# Altium PCB TourniquetPCBV1.PcbDoc (part 2 of 2)
Units mil, origin at the board's own origin, x right, y up, seen from the top; angles counter-clockwise.
Board outline 6000 x 4000 mil, 2 copper layers (Top Layer, Bottom Layer); 66 components, 50 nets, 230 pads, 0 vias.
Unrouted connection lines stored in the file: 158.
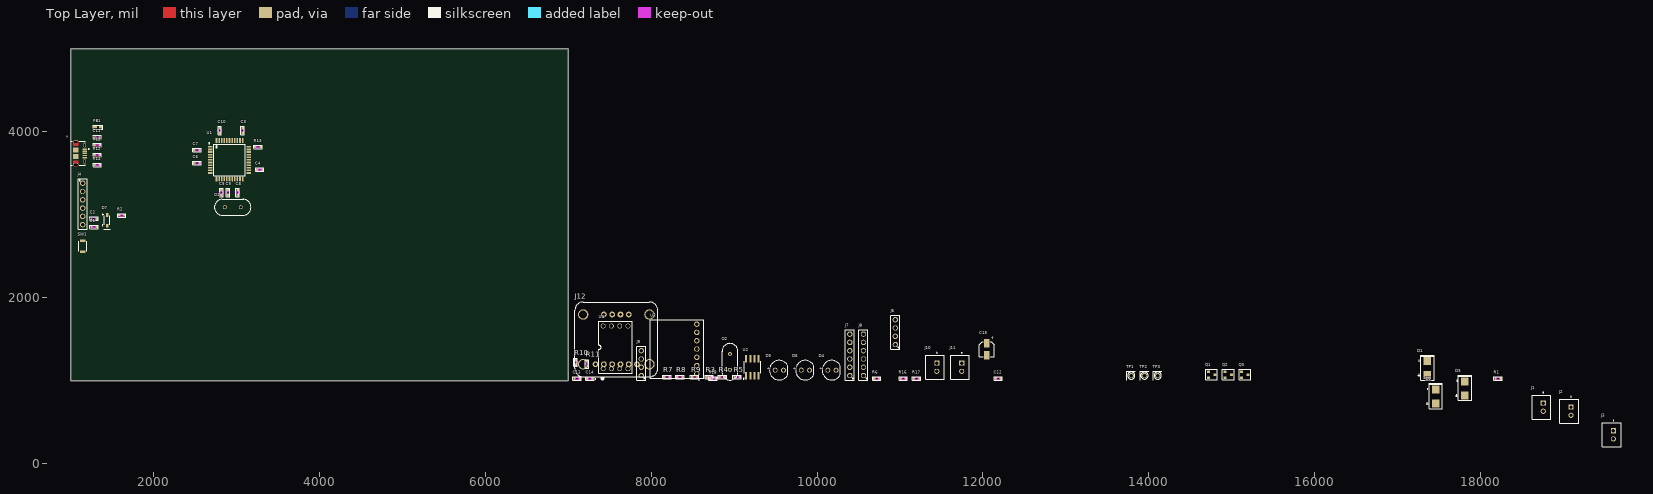
[diagram p0: Top Layer view]

## Part data (continued)
O2: "32.768 kHz ±20ppm Crystal 6pF 35 kOhms Cylindrical Can, Radial", Case/Package=SMD/SMT, ESR (Equivalent Series Resistance)=60Ω, Frequency=16MHz, Frequency Stability=18ppm, Frequency Tolerance=0.001%, Load Capacitance=9pF, Manufacturer=Epson, Manufacturer Part Number="TSX-3225 16.0000MF18X-AC0", Max Operating Temperature=85°C, Min Operating Temperature=-40°C, Supplier Part Number=SER4070CT-ND, Category=Crystals, China RoHS=Compliant, ComponentLink1Description=https://datasheet.octopart.com:443/TSX-3225-16.0000MF18X-AC0-Epson-datasheet-61114919.pdf?src-supplier=Electro+Sonic, ComponentLink1URL=https://datasheet.octopart.com:443/TSX-3225-16.0000MF18X-AC0-Epson-datasheet-61114919.pdf?src-supplier=Electro+Sonic, ComponentLink2Description=https://datasheet.octopart.com:443/TSX-322516.0000MF18X-AC0-Epson-datasheet-189100294.pdf?src-supplier=Electro+Sonic, ComponentLink2URL=https://datasheet.octopart.com:443/TSX-322516.0000MF18X-AC0-Epson-datasheet-189100294.pdf?src-supplier=Electro+Sonic, ComponentLink3Description=https://datasheet.octopart.com:443/TSX-322516.0000MF18X-AC0-Epson-datasheet-180663999.pdf?src-supplier=IHS, ComponentLink3URL=https://datasheet.octopart.com:443/TSX-322516.0000MF18X-AC0-Epson-datasheet-180663999.pdf?src-supplier=IHS, ComponentLink4Description=https://datasheet.octopart.com:443/TSX-3225-16.0000MF18X-AC0-Epson-datasheet-140567378.pdf?src-supplier=Arrow.cn, ComponentLink4URL=https://datasheet.octopart.com:443/TSX-3225-16.0000MF18X-AC0-Epson-datasheet-140567378.pdf?src-supplier=Arrow.cn, ComponentLink5Description=http://sigma.octopart.com:80/149135495/reach_statement/Epson-TSX-3225-16.0000MF18X-AC0.pdf?src-supplier=Compliance+Statements, ComponentLink5URL=http://sigma.octopart.com:80/149135495/reach_statement/Epson-TSX-3225-16.0000MF18X-AC0.pdf?src-supplier=Compliance+Statements, ComponentLink6Description=http://sigma.octopart.com:80/149135496/rohs_statement/Epson-TSX-3225-16.0000MF18X-AC0.pdf?src-supplier=Compliance+Statements, ComponentLink6URL=http://sigma.octopart.com:80/149135496/rohs_statement/Epson-TSX-3225-16.0000MF18X-AC0.pdf?src-supplier=Compliance+Statements, ESR=60Ω, Height=600µm, Length=3.2004mm, Lifecycle Status=Production, Mounting Technology="Surface Mount", Pricing="1=0.37, 10=0.324, 25=0.3068, 50=0.294, 100=0.2819, 250=0.26656, 500=0.25552 (USD)", REACH SVHC=Yes, RoHS=Compliant, Schedule B=8541600080, Stock=610, Supplier=DigiKey, Tolerance=0.001%, Width=2.4892mm
Q1 Q2 Q3: Current Rating=2A, Manufacturer="MCC (Micro Commercial Components)", Max Operating Temperature=105°C, Min Operating Temperature=-55°C, Supplier Part Number 1=WM3590-ND, Voltage Rating=125V, ComponentLink1Description=Datasheet, ComponentLink1URL=https://tools.molex.com/pdm_docs/ps/PS-87831-027.pdf, Fastening Type="Latch Holder", Gender=Male, Manufacturer Part Number=SI2300-TP, Number of Positions=6, Number of Rows=2, Orientation=Vertical, Part Number=SI2300-TP, Reviewed=No, Series=-, Supplier 1=Digi-Key
R1 R2 R3 R4 R5 R6 R7 R8 R9 R10 R11 R12 R13 R14 R15 R16 R17 R18: library part RESISTOR, Case Code (Imperial)=0603, Case Code (Metric)=1608, Max Operating Temperature=155°C, Max Power Dissipation=100mW, Min Operating Temperature=-55°C, Resistance=10kR, Resistance Tolerance=1%, Resistor Type="Thick Film", Temperature Coefficient=100ppm/°C, Voltage Rating=75V, Voltage Rating (DC)=50V, Case/Package=0603, Construction=Rectangular, Depth=0.8mm, Features="Moisture Resistant", Height=0.45mm, Lead Free="Lead Free", Lead Pitch=0.3mm, Length=1.6mm, Military Standard=Not, Number of Pins=2, Number of Terminations=2, Packaging="Tape and Reel", Power Rating=100mW, RoHS Compliant=Yes, Series=RC, Size Code=0603, Termination=SMD/SMT, Tolerance=1%, Weight=7.1E-05oz, Width=0.8mm
SW1: "Switch Tactile N.O. SPST Round Button Gull Wing 0.05A 12VDC 1.5N SMD Embossed T/R", Ambient Temperature Range High=70°C, Case/Package=SMD/SMT, Color=Black, Contact Current Rating=50mA, Contact Resistance=100mΩ, Insulation Resistance=100MΩ, Manufacturer=Omron, Manufacturer Part Number=B3U-1100PM, Max Voltage Rating (DC)=12V, Min Operating Temperature=-25°C, Operating Force=1.5N, Ratings="Dust Proof", Supplier Part Number=SW1451CT-ND, Actuator Length=400µm, Category="Tactile Switches", ComponentLink1Description=https://datasheet.octopart.com:443/B3U-1100PM-Omron-datasheet-62106914.pdf?src-supplier=IHS, ComponentLink1URL=https://datasheet.octopart.com:443/B3U-1100PM-Omron-datasheet-62106914.pdf?src-supplier=IHS, ComponentLink2Description=https://datasheet.octopart.com:443/B3U-1100PM-Omron-datasheet-10910421.pdf?src-supplier=Omron, ComponentLink2URL=https://datasheet.octopart.com:443/B3U-1100PM-Omron-datasheet-10910421.pdf?src-supplier=Omron, ComponentLink3Description=https://datasheet.octopart.com:443/B3U-1100PM-Omron-datasheet-17589256.pdf?src-supplier=Farnell, ComponentLink3URL=https://datasheet.octopart.com:443/B3U-1100PM-Omron-datasheet-17589256.pdf?src-supplier=Farnell, ComponentLink4Description=https://datasheet.octopart.com:443/B3U-1100PM-Omron-datasheet-5458533.pdf?src-supplier=Sager+Electronics, ComponentLink4URL=https://datasheet.octopart.com:443/B3U-1100PM-Omron-datasheet-5458533.pdf?src-supplier=Sager+Electronics, ComponentLink5Description=https://datasheet.octopart.com:443/B3U-1100PM-Omron-datasheet-110759174.pdf?src-supplier=Newark, ComponentLink5URL=https://datasheet.octopart.com:443/B3U-1100PM-Omron-datasheet-110759174.pdf?src-supplier=Newark, ComponentLink6Description=https://datasheet.octopart.com:443/B3U-1100PM-Omron-datasheet-156114341.pdf?src-supplier=TME, ComponentLink6URL=https://datasheet.octopart.com:443/B3U-1100PM-Omron-datasheet-156114341.pdf?src-supplier=TME, Connector Type=SMD/SMT, Contact Plating=Silver, Current Rating=50mA, Electrical Life=200kcycles, Height=1.2mm, Illumination Type="Illuminated, Non-Illuminated", Length=3mm, Life (Cycles)=200kcycles, Lifecycle Status=Production, Max Operating Temperature=70°C, Mechanical Life=200kcycles, Mounting Technology="Surface Mount", Number of Positions=1, Orientation=Straight, Packaging=Digi-Reel®, Pricing="1=0.77, 10=0.77 (USD)", REACH SVHC=No, RoHS=Compliant, Sealable=IP40, Stock=1875, Supplier=DigiKey, Switch Function=Off-Mom, Switch Travel=150µm, Termination=SMD/SMT, Throw Configuration=SPST, Voltage Rating (DC)=12V, Weight=22mg
TP1 TP2 TP3: "Test Point Hole", Current Rating=2A, Manufacturer=Molex, Manufacturer Part Number=0878310641, Max Operating Temperature=105°C, Min Operating Temperature=-55°C, Supplier Part Number 1=WM3590-ND, Voltage Rating=125V, ComponentLink1Description=Datasheet, ComponentLink1URL=https://tools.molex.com/pdm_docs/ps/PS-87831-027.pdf, Fastening Type="Latch Holder", Gender=Male, Mount="Through Hole", Number of Positions=6, Number of Rows=2, Orientation=Vertical, Reviewed=No, Series="Milli-Grid 87831", Supplier 1=Digi-Key
U1: "Microcontroller, Usb Controller 16/32K Of Isp Flash, TQFP44 Industrial, 8-BIT", Case/Package=TQFP, Clock Frequency=16MHz, Manufacturer=Microchip, Max Operating Temperature=85°C, Max Supply Voltage=5.5V, Min Operating Temperature=-40°C, Min Supply Voltage=2.7V, Supplier Part Number=ATMEGA32U4-AU-ND, Category=Microcontrollers, ComponentLink1Description=https://datasheet.octopart.com:443/ATMEGA32U4-AU-Microchip-datasheet-101746192.pdf?src-supplier=Upverter, ComponentLink1URL=https://datasheet.octopart.com:443/ATMEGA32U4-AU-Microchip-datasheet-101746192.pdf?src-supplier=Upverter, ComponentLink2Description=https://datasheet.octopart.com:443/ATMEGA32U4-AU-Microchip-datasheet-24967522.pdf?src-supplier=Upverter, ComponentLink2URL=https://datasheet.octopart.com:443/ATMEGA32U4-AU-Microchip-datasheet-24967522.pdf?src-supplier=Upverter, ComponentLink3Description=https://datasheet.octopart.com:443/ATMEGA32U4-AU-Microchip-datasheet-65729178.pdf?src-supplier=TME, ComponentLink3URL=https://datasheet.octopart.com:443/ATMEGA32U4-AU-Microchip-datasheet-65729178.pdf?src-supplier=TME, ComponentLink4Description=https://datasheet.octopart.com:443/ATMEGA32U4-AU-Atmel-datasheet-10917087.pdf?src-supplier=TME, ComponentLink4URL=https://datasheet.octopart.com:443/ATMEGA32U4-AU-Atmel-datasheet-10917087.pdf?src-supplier=TME, ComponentLink5Description=https://datasheet.octopart.com:443/ATMEGA32U4-AU-Microchip-datasheet-13542643.pdf?src-supplier=element14+APAC, ComponentLink5URL=https://datasheet.octopart.com:443/ATMEGA32U4-AU-Microchip-datasheet-13542643.pdf?src-supplier=element14+APAC, ComponentLink6Description=https://datasheet.octopart.com:443/ATMEGA32U4-AU-Microchip-datasheet-62316224.pdf?src-supplier=element14+APAC, ComponentLink6URL=https://datasheet.octopart.com:443/ATMEGA32U4-AU-Microchip-datasheet-62316224.pdf?src-supplier=element14+APAC, ComponentLink7Description=https://datasheet.octopart.com:443/ATMEGA32U4-AU-Atmel-datasheet-13432554.pdf?src-supplier=Newark, ComponentLink7URL=https://datasheet.octopart.com:443/ATMEGA32U4-AU-Atmel-datasheet-13432554.pdf?src-supplier=Newark, ComponentLink8Description=https://datasheet.octopart.com:443/ATMEGA32U4-AU-Atmel-datasheet-8370675.pdf?src-supplier=Newark, ComponentLink8URL=https://datasheet.octopart.com:443/ATMEGA32U4-AU-Atmel-datasheet-8370675.pdf?src-supplier=Newark, ComponentLink9Description=https://datasheet.octopart.com:443/ATMEGA32U4-AU-Atmel-datasheet-8828238.pdf?src-supplier=element14, ComponentLink9URL=https://datasheet.octopart.com:443/ATMEGA32U4-AU-Atmel-datasheet-8828238.pdf?src-supplier=element14, ComponentLink10Description=https://datasheet.octopart.com:443/ATMEGA32U4-AU-Atmel-datasheet-8383889.pdf?src-supplier=element14, ComponentLink10URL=https://datasheet.octopart.com:443/ATMEGA32U4-AU-Atmel-datasheet-8383889.pdf?src-supplier=element14, ComponentLink11Description=https://datasheet.octopart.com:443/ATMEGA32U4-AU-Atmel-datasheet-14106918.pdf?src-supplier=iiiC, ComponentLink11URL=https://datasheet.octopart.com:443/ATMEGA32U4-AU-Atmel-datasheet-14106918.pdf?src-supplier=iiiC, ComponentLink12Description=http://sigma.octopart.com:80/188450203/materials_sheet/Microchip-ATMEGA32U4-AU.pdf?src-supplier=Compliance+Statements, ComponentLink12URL=http://sigma.octopart.com:80/188450203/materials_sheet/Microchip-ATMEGA32U4-AU.pdf?src-supplier=Compliance+Statements, ComponentLink13Description=http://sigma.octopart.com:80/rohs_statement/Microchip-company-71.pdf?src-supplier=Compliance+Statements, ComponentLink13URL=http://sigma.octopart.com:80/rohs_statement/Microchip-company-71.pdf?src-supplier=Compliance+Statements, ComponentLink14Description=http://sigma.octopart.com:80/reach_statement/Microchip-company-70.pdf?src-supplier=Compliance+Statements, ComponentLink14URL=http://sigma.octopart.com:80/reach_statement/Microchip-company-70.pdf?src-supplier=Compliance+Statements, ComponentLink15Description=http://sigma.octopart.com:80/conflict_mineral_statement/Microchip-company-69.pdf?src-supplier=Compliance+Statements, ComponentLink15URL=http://sigma.octopart.com:80/conflict_mineral_statement/Microchip-company-69.pdf?src-supplier=Compliance+Statements, ComponentLink16Description=http://sigma.octopart.com:80/conflict_mineral_statement/Microchip-company-68.pdf?src-supplier=Compliance+Statements, ComponentLink16URL=http://sigma.octopart.com:80/conflict_mineral_statement/Microchip-company-68.pdf?src-supplier=Compliance+Statements, ComponentLink17Description=http://sigma.octopart.com:80/reach_statement/Atmel-company-6.pdf?src-supplier=Compliance+Statements, ComponentLink17URL=http://sigma.octopart.com:80/reach_statement/Atmel-company-6.pdf?src-supplier=Compliance+Statements, ComponentLink18Description=http://sigma.octopart.com:80/rohs_statement/Atmel-company-5.pdf?src-supplier=Compliance+Statements, ComponentLink18URL=http://sigma.octopart.com:80/rohs_statement/Atmel-company-5.pdf?src-supplier=Compliance+Statements, ComponentLink19Description=http://sigma.octopart.com:80/rohs_statement/Atmel-company-4.pdf?src-supplier=Compliance+Statements, ComponentLink19URL=http://sigma.octopart.com:80/rohs_statement/Atmel-company-4.pdf?src-supplier=Compliance+Statements, Core Architecture=AVR, Country of Assembly="Philippines, Thailand", Country of Fabrication="United States of America", Country of Origin="Philippines, Thailand", Data Bus Width=8b, Export Control Classification Number (ECCN) Code=EAR99, Frequency=16MHz, Harmonized Tariff Schedule (HTS) Code=8542.31.0015, Height=1.05mm, Interface="I2C, I2S, SPI, UART, USART, USB", Lead Free="Lead Free", Length=10mm, Lifecycle Status=Production, Manufacturer Package Identifier=ATMEGA32U4-AU, Manufacturer Part Number=ATMEGA32U4-AU, Memory Format=FLASH, Memory Size=32kB, Mounting Technology="Surface Mount", Number of ADC Channels=12, Number of I2C Channels=1, Number of I/Os=26, Number of Programmable I/O=26, Number of PWM Channels=8, Number of SPI Channels=1, Number of Timers/Counters=5, Oscillator Type=External, Peripherals="Brown-out Detect/Reset, POR, PWM, WDT", Pins=44, Pricing="1=5.29, 25=4.84, 100=4.39 (USD)", Projected EOL Date=2039-11-04, Radiation Hardening=No, RAM Size=2.5kB, REACH SVHC=No, RoHS=Compliant, Schedule B="8542310000, 8542310000|8542310000|8542310000|8542310000|8542310000", Stock=7673, Supplier=DigiKey, Watchdog Timer=Yes, Width=10mm
U2: library part MCP7940M, "RTC Clock", Current Rating=2A, Manufacturer=Molex, Manufacturer Part Number=0878310641, Max Operating Temperature=105°C, Min Operating Temperature=-55°C, Supplier Part Number 1=WM3590-ND, Voltage Rating=125V, ComponentLink1Description=Datasheet, ComponentLink1URL=https://tools.molex.com/pdm_docs/ps/PS-87831-027.pdf, Fastening Type="Latch Holder", Gender=Male, Mount="Through Hole", Number of Positions=6, Number of Rows=2, Orientation=Vertical, Part Number=0878310641, Reviewed=No, Series="Milli-Grid 87831", Supplier 1=Digi-Key
U3: library part "Adafruit MPRLS Ported Pressure Sensor", "Adafruit MPRLS Ported Pressure Sensor", Color=Black, Contact Resistance=20mΩ, Current Rating=3A, Insulation Resistance=1GΩ, Manufacturer="Wurth Elektronik", Manufacturer Part Number=61300711121, Max Operating Temperature=105°C, Min Operating Temperature=-40°C, Operating Supply Voltage=250V, Supplier Part Number=732-5320-ND, Category="Headers and Wire Housings", ComponentLink1Description=https://datasheet.octopart.com:443/61300711121-Wurth-Elektronik-datasheet-169474601.pdf?src-supplier=Wurth+Elektronik, ComponentLink1URL=https://datasheet.octopart.com:443/61300711121-Wurth-Elektronik-datasheet-169474601.pdf?src-supplier=Wurth+Elektronik, ComponentLink2Description=https://datasheet.octopart.com:443/61300711121-W%C3%BCrth-Elektronik-datasheet-44382959.pdf?src-supplier=Wurth+Elektronik, ComponentLink2URL=https://datasheet.octopart.com:443/61300711121-W%C3%BCrth-Elektronik-datasheet-44382959.pdf?src-supplier=Wurth+Elektronik, ComponentLink3Description=https://datasheet.octopart.com:443/61300711121-W%C3%BCrth-Elektronik-datasheet-149524083.pdf?src-supplier=Farnell, ComponentLink3URL=https://datasheet.octopart.com:443/61300711121-W%C3%BCrth-Elektronik-datasheet-149524083.pdf?src-supplier=Farnell, ComponentLink4Description=https://datasheet.octopart.com:443/61300711121-W%C3%BCrth-Elektronik-datasheet-21154836.pdf?src-supplier=element14+APAC, ComponentLink4URL=https://datasheet.octopart.com:443/61300711121-W%C3%BCrth-Elektronik-datasheet-21154836.pdf?src-supplier=element14+APAC, Connector Type="Male Pin", Contact Material=Copper, Contact Mating Length=5.9944mm, Contact Plating=Gold, Gender=Male, Lead Pitch=2.54mm, Length=17.78mm, Mounting Technology="Through Hole", Number of Contacts=7, Number of Positions=7, Number of Rows=1, Orientation=Vertical, Packaging=Bulk, Pins=7, Pitch=2.54mm, Pricing="1=0.36, 10=0.302, 25=0.252, 50=0.2106, 100=0.1908, 1000=0.17375 (USD)", RoHS=Compliant, Stock=8639, Supplier=DigiKey, Termination=Solder
U4: "Pressure Sensor ±15PSI (±103.42kPa) Differential Male - 0.19\" (4.93mm) Tube 0.5 V ~ 4.5 V 8-DIP (0.524\", 13.30mm), Top Port", Color=Black, Current Rating=3A, Dielectric Material=Polyamide, Manufacturer=Sullins, Manufacturer Part Number=NPTC041KFXC-RC, Supplier Part Number=S5596-ND, Category="Card Edge Connectors", ComponentLink1Description=https://datasheet.octopart.com:443/NPTC041KFXC-RC-Sullins-datasheet-138810743.pdf?src-supplier=IHS, ComponentLink1URL=https://datasheet.octopart.com:443/NPTC041KFXC-RC-Sullins-datasheet-138810743.pdf?src-supplier=IHS, ComponentLink2Description=https://datasheet.octopart.com:443/NPTC041KFXC-RC-Sullins-datasheet-41308905.pdf?src-supplier=Future+Electronics, ComponentLink2URL=https://datasheet.octopart.com:443/NPTC041KFXC-RC-Sullins-datasheet-41308905.pdf?src-supplier=Future+Electronics, ComponentLink3Description=https://datasheet.octopart.com:443/NPTC041KFXC-RC-Sullins-datasheet-120059.pdf?src-supplier=DigiKey, ComponentLink3URL=https://datasheet.octopart.com:443/NPTC041KFXC-RC-Sullins-datasheet-120059.pdf?src-supplier=DigiKey, Connector Type="Header, Socket", Contact Gender=Female, Contact Material=Bronze, Contact Plating=Tin, Height=7.1mm, Housing Color=Black, Housing Material=Nylon, Lead Free="Lead Free", Length=10.2mm, Lifecycle Status=Production, Mounting Technology="Surface Mount", Number of Positions=4, Number of Rows=2, Packaging=Bulk, Pins=4, Pitch=2.54mm, Pricing="1=0.57, 58=0.43086, 116=0.41026, 522=0.36887, 1044=0.35125, 5046=0.31428, 10034=0.30044 (USD)", REACH SVHC=Yes, RoHS=Compliant, Stock=44539, Supplier=DigiKey, Terminal Pitch=5.08mm, Termination=Solder, Width=2.5mm

## Nets (pads, with @x,y where several pads share a name; then routed paths per layer and width w, separated by ;. In a path a pad name is that pad's centre, name@x,y a point inside that pad or via, vN(x,y) a via of type N, cw(c..) or ccw(c..) an arc to the next point about the centre after c; other vN are vias at no path point)
A0: J7.6 U1.36
A1: J7.5 U1.37
A2: J7.4 U1.38
A3: J7.3 U1.39
A4: J7.2 U1.40
A5: J7.1 U1.41
D0: J8.2 U1.20
D1: J8.3 U1.21
D4: J8.4 U1.25
D6: J8.5 U1.27
D_N: *.3 R14.2
D_P: *.2 R12.2
DISP_CLK: J6.4 U1.28
DISP_DIO: J6.3 U1.29
GND: *.5 *.SH1 *.SH2 *.SH3 *.SH4 *.SH5 *.SH6 C1.2 C2.2 C3.2 C4.2 C5.2 C6.2 C7.2 C8.1 C9.1 C10.2 C11.2 C12.2 C13.2 C14.2 C15.2 D4.2 D5.2 D6.2 J4.6 J6.1 J8.6 J9.4 J12.3 Q1.2 Q2.2 Q3.2 R7.2 R8.2 R9.2 R13.1 R15.1 SW1.2 U1.5 U1.15 U1.23 U1.35 U1.43 U2.3 U2.4 U3.3 U4.1
MISO: J4.4 U1.11
MOSI: J4.3 U1.10
NetC10_1: C10.1 U1.42
NetC12_1: C12.1 U1.6
NetD4_1: D4.1 R6.2
NetD5_1: D5.1 R16.2
NetD6_1: D6.1 R17.2
NetQ1_1: Q1.1 R3.2 R7.1
NetQ2_1: Q2.1 R4.2 R8.1
NetQ3_1: Q3.1 R5.2 R9.1
NetR2_1: R2.1 SW1.1
NetR13_2: R13.2 U1.33
PUMP1-: D1.1 J1.2 Q1.3
PUMP1_CTRL: R3.1 TP1.1 U1.31
PUMP2-: D2.1 J2.2 Q2.3
PUMP2_CTRL: R4.1 TP2.1 U1.32
RD_N: R14.1 U1.3
RD_P: R12.1 U1.4
RST: D7.2 J4.5 R1.2 R2.2 U1.13
RTC_MFP: R18.1 U1.26 U2.7
RTC_X1: C14.1 O2.2 U2.1
RTC_X2: C13.1 O2.1 U2.2
SCK: J4.2 U1.9
SCL: J9.2 J12.4 R11.2 U1.18 U2.6 U3.4 U4.4
SDA: J9.3 J12.5 R10.2 U1.19 U2.5 U3.5 U4.3
STATUS_LED1: R16.1 U1.8
STATUS_LED2: R17.1 U1.12
VALVE-: D3.1 J3.2 Q3.3
VALVE_CTRL: R5.1 TP3.1 U1.30
VBUS: *.1 FB1.2@1293.31,4055.12
VCC5V0: C1.1 C2.1 C3.1 C4.1 C5.1 C6.1 C7.1 C11.1 C15.1 D1.2 D2.2 D3.2 D7.1 FB1.1@1358.27,4055.12 J1.1 J2.1 J3.1 J4.1 J6.2 J8.1 J9.1 J11.2 J12.1 R1.1 R6.1 R10.1 R11.1 R15.2 R18.2 U1.2 U1.7 U1.14 U1.24 U1.34 U1.44 U2.8 U3.1 U4.2
VCC5VBAT: J10.1
VCC5VBAT_SW: J10.2 J11.1
XTAL1: C8.2 O1.1 U1.17
XTAL2: C9.2 O1.2 U1.16
pads on no net: *.4 FB1.1@1358.27,4055.12 FB1.2@1293.31,4055.12 J12.2 J12.6 J12.7 J12.8 J12.9 J12.10 J12.P1 J12.P2 J12.P3 J12.P4 U1.1 U1.22 U3.2 U3.6 U3.7 U4.5 U4.6 U4.7 U4.8

## Text inside footprints (layer, text, board x,y; h text height)
*: Mechanical 13 "PCB EDGE" at 1008.86,3572.83 h32 r270
C15: Mechanical 13 "+" at 12129.92,1492.13 h40 r90; Top Overlay "+" at 12129.92,1492.13 h40 r90
D4: Mechanical 13 "+" at 10026.97,1130.16 h40; Top Overlay "+" at 10027.24,1129.65 h40
D5: Mechanical 13 "+" at 9391.97,1130.16 h40; Top Overlay "+" at 9392.24,1129.65 h40
D6: Mechanical 13 "+" at 9706.97,1130.16 h40; Top Overlay "+" at 9707.24,1129.65 h40